# Altium PCB PCB_cmv4000.PcbDoc
Units mm, origin at the board's own origin, x right, y up, seen from the top; angles counter-clockwise.
Board outline 80.74 x 60.93 mm, 4 copper layers (TL, Supply, GND, BL), stack 0.778 mm thick; 43 components, 44 nets, 1083 pads, 82 vias.
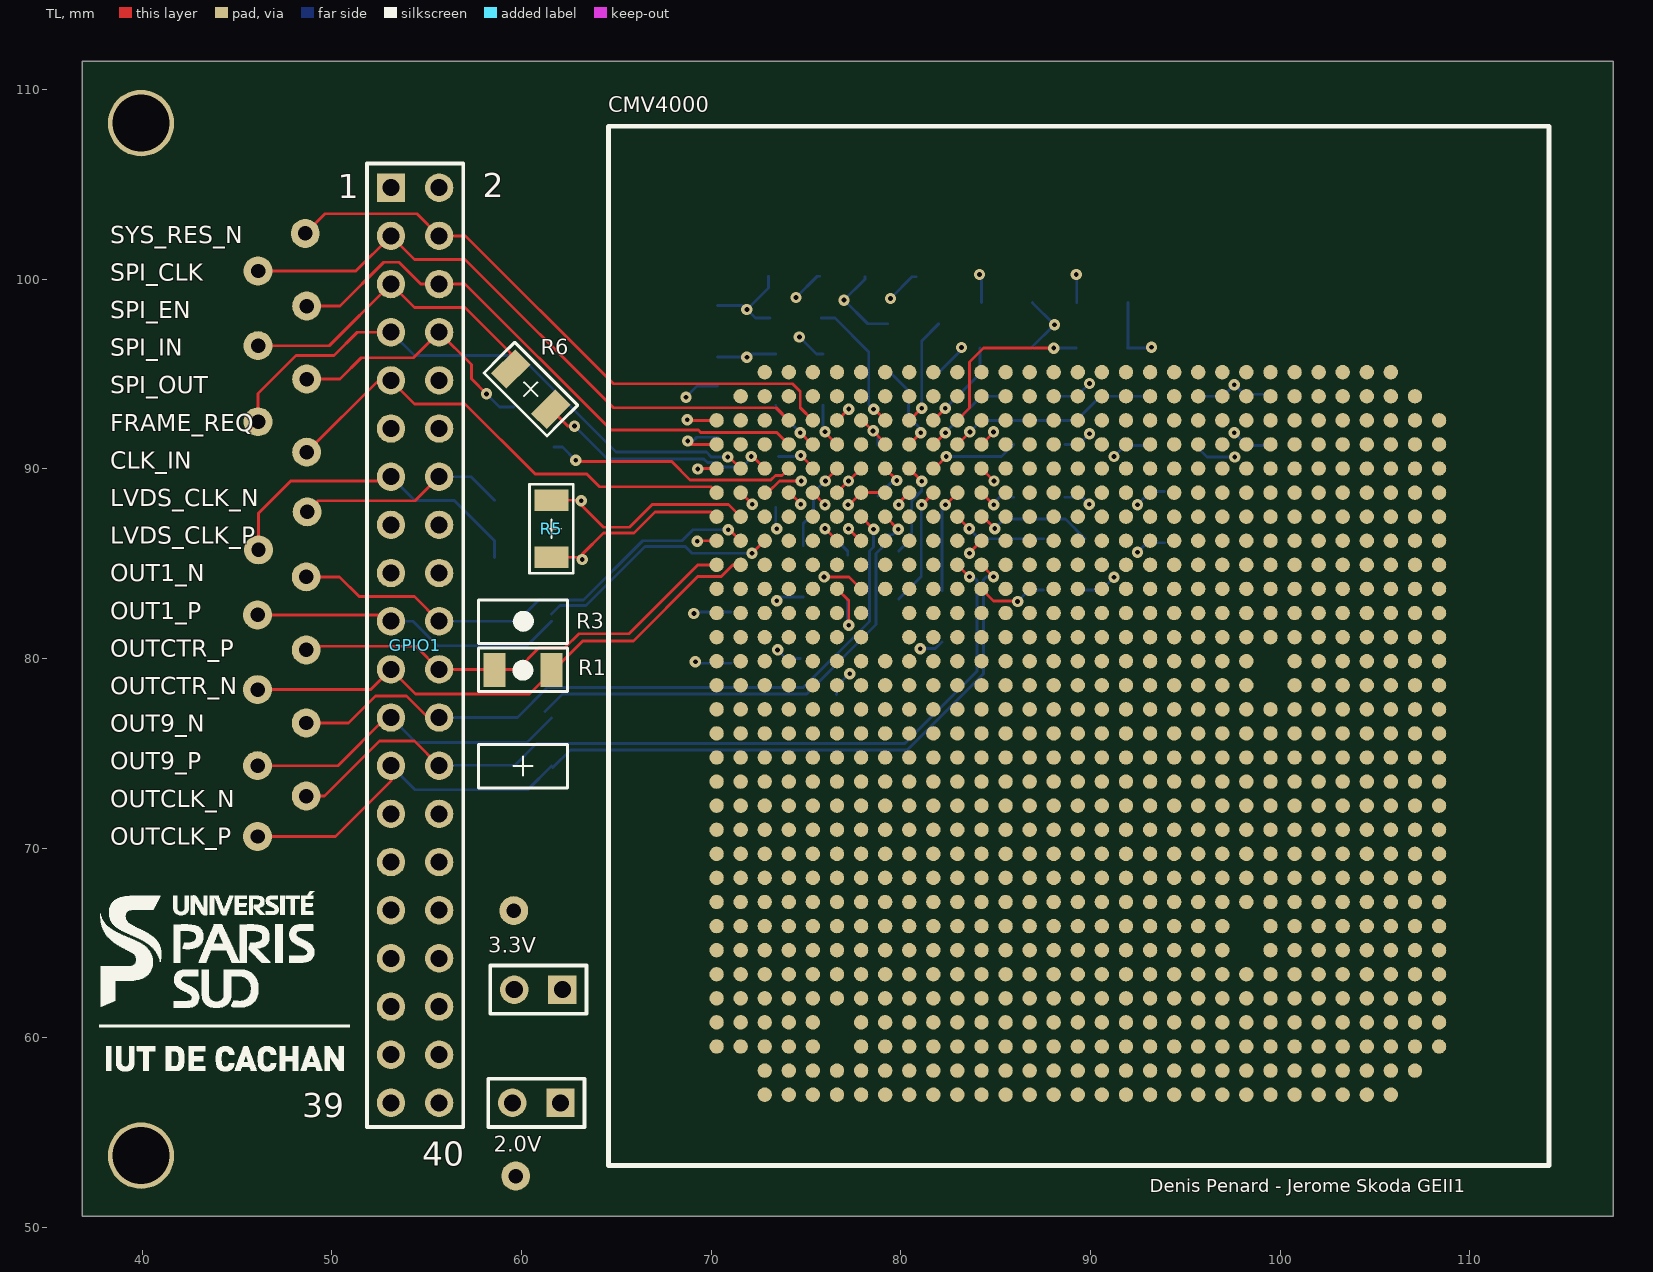
[diagram p0: TL view]
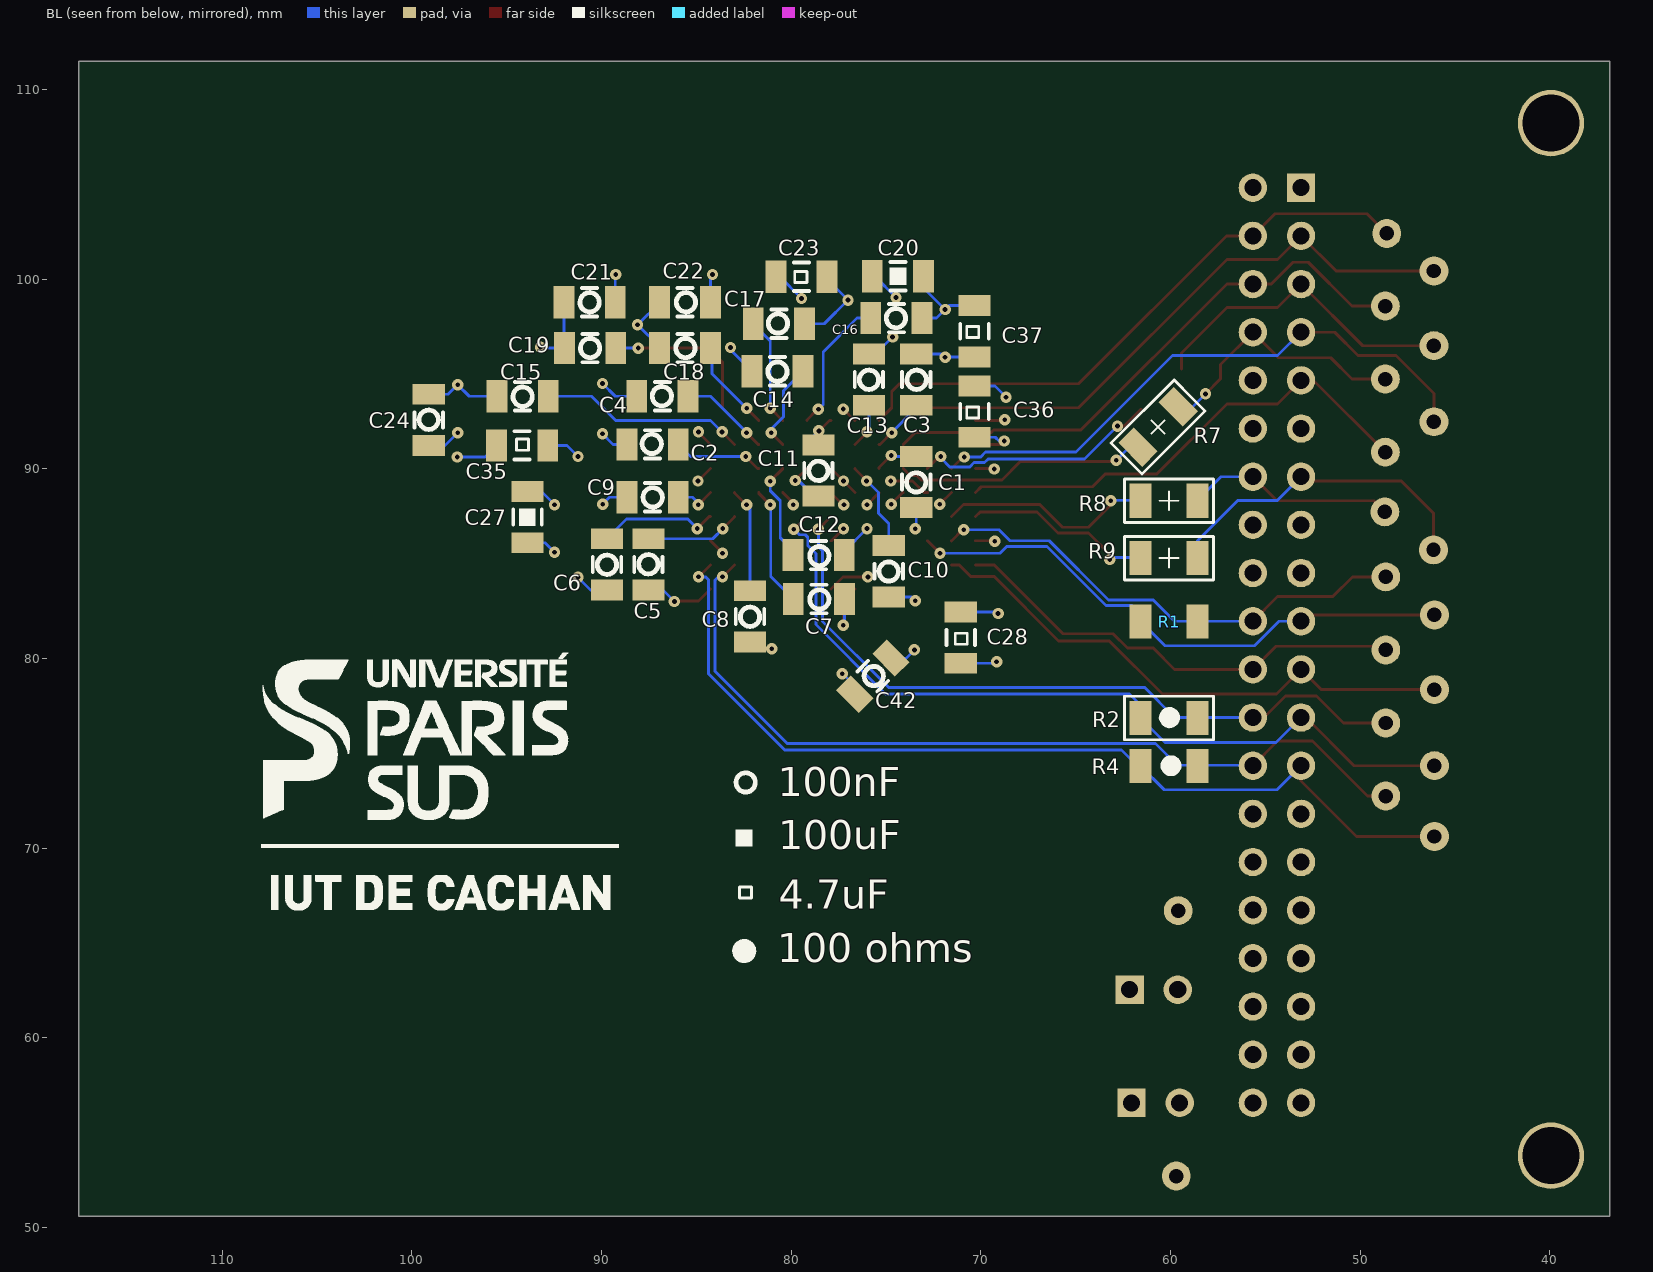
[diagram p1: BL view, seen from below]
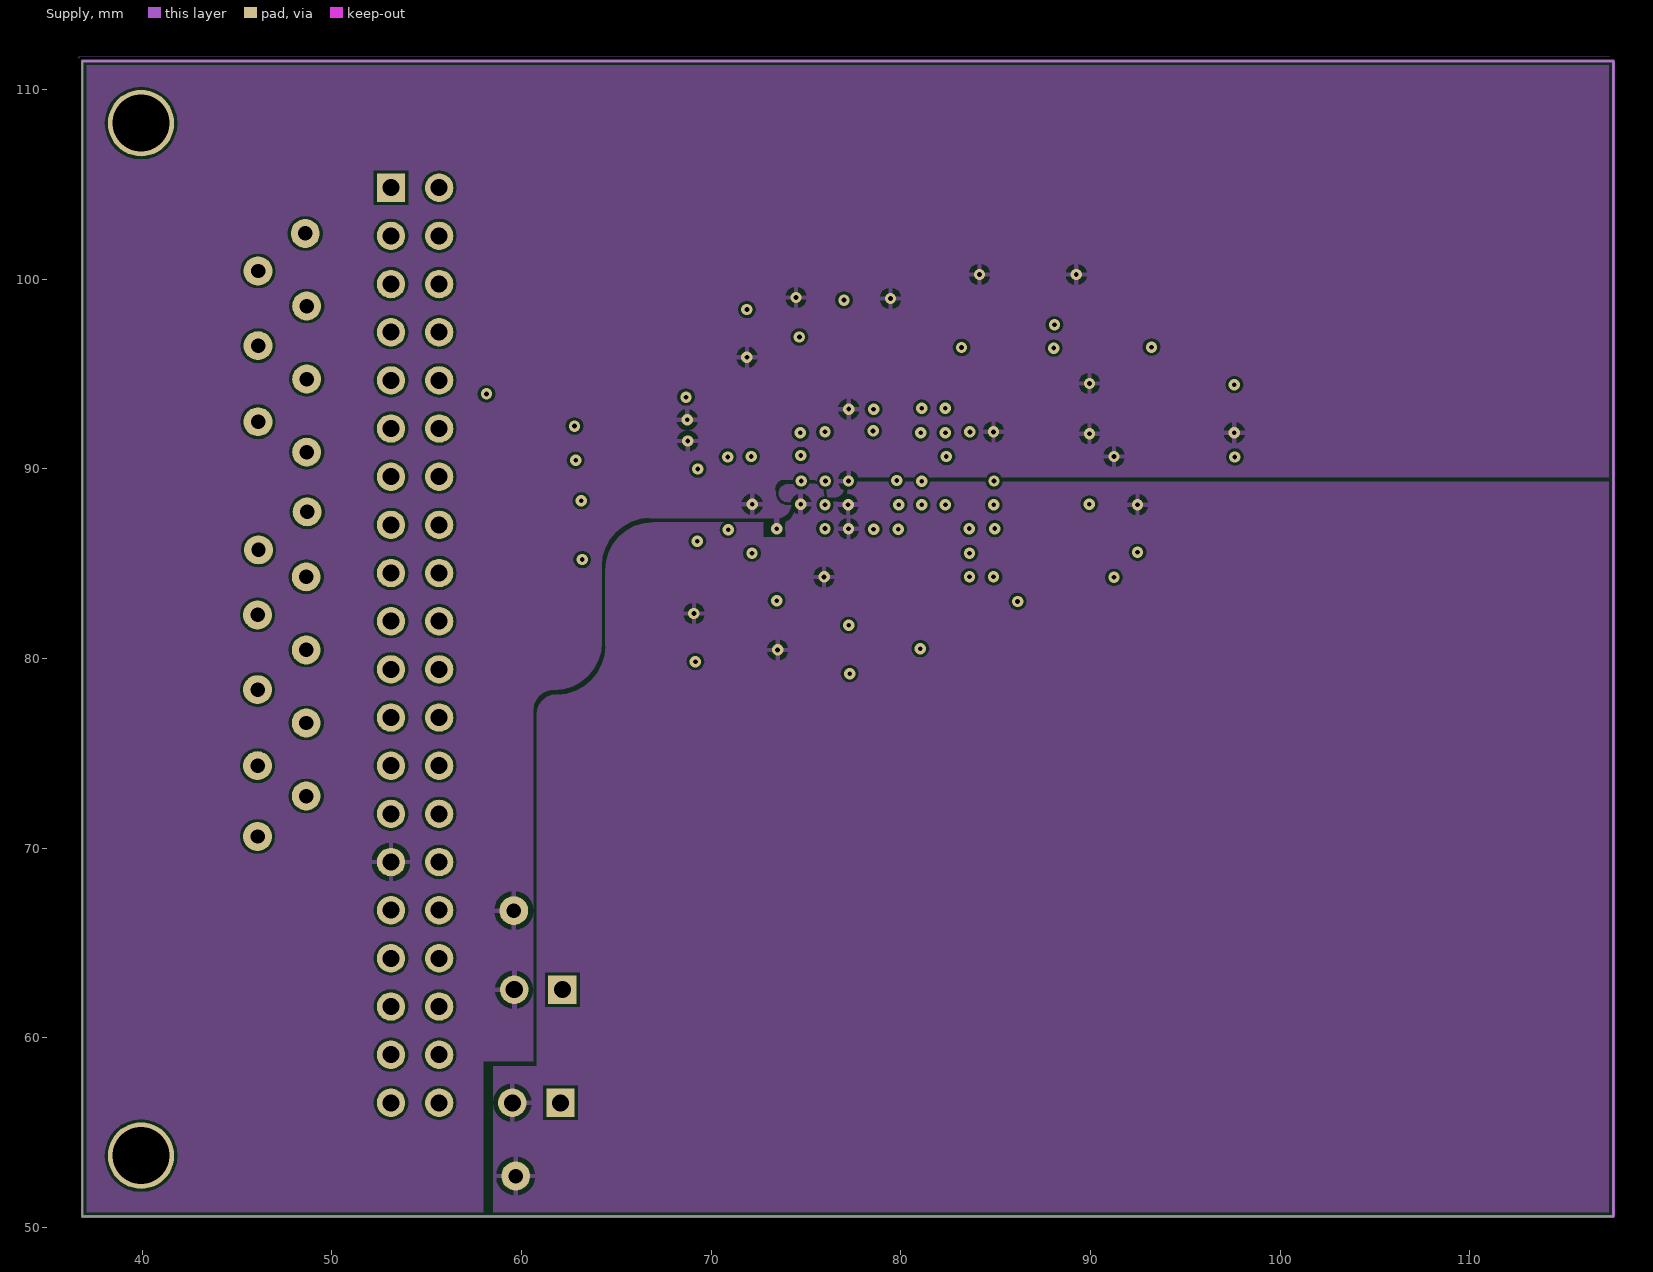
[diagram p2: Supply]
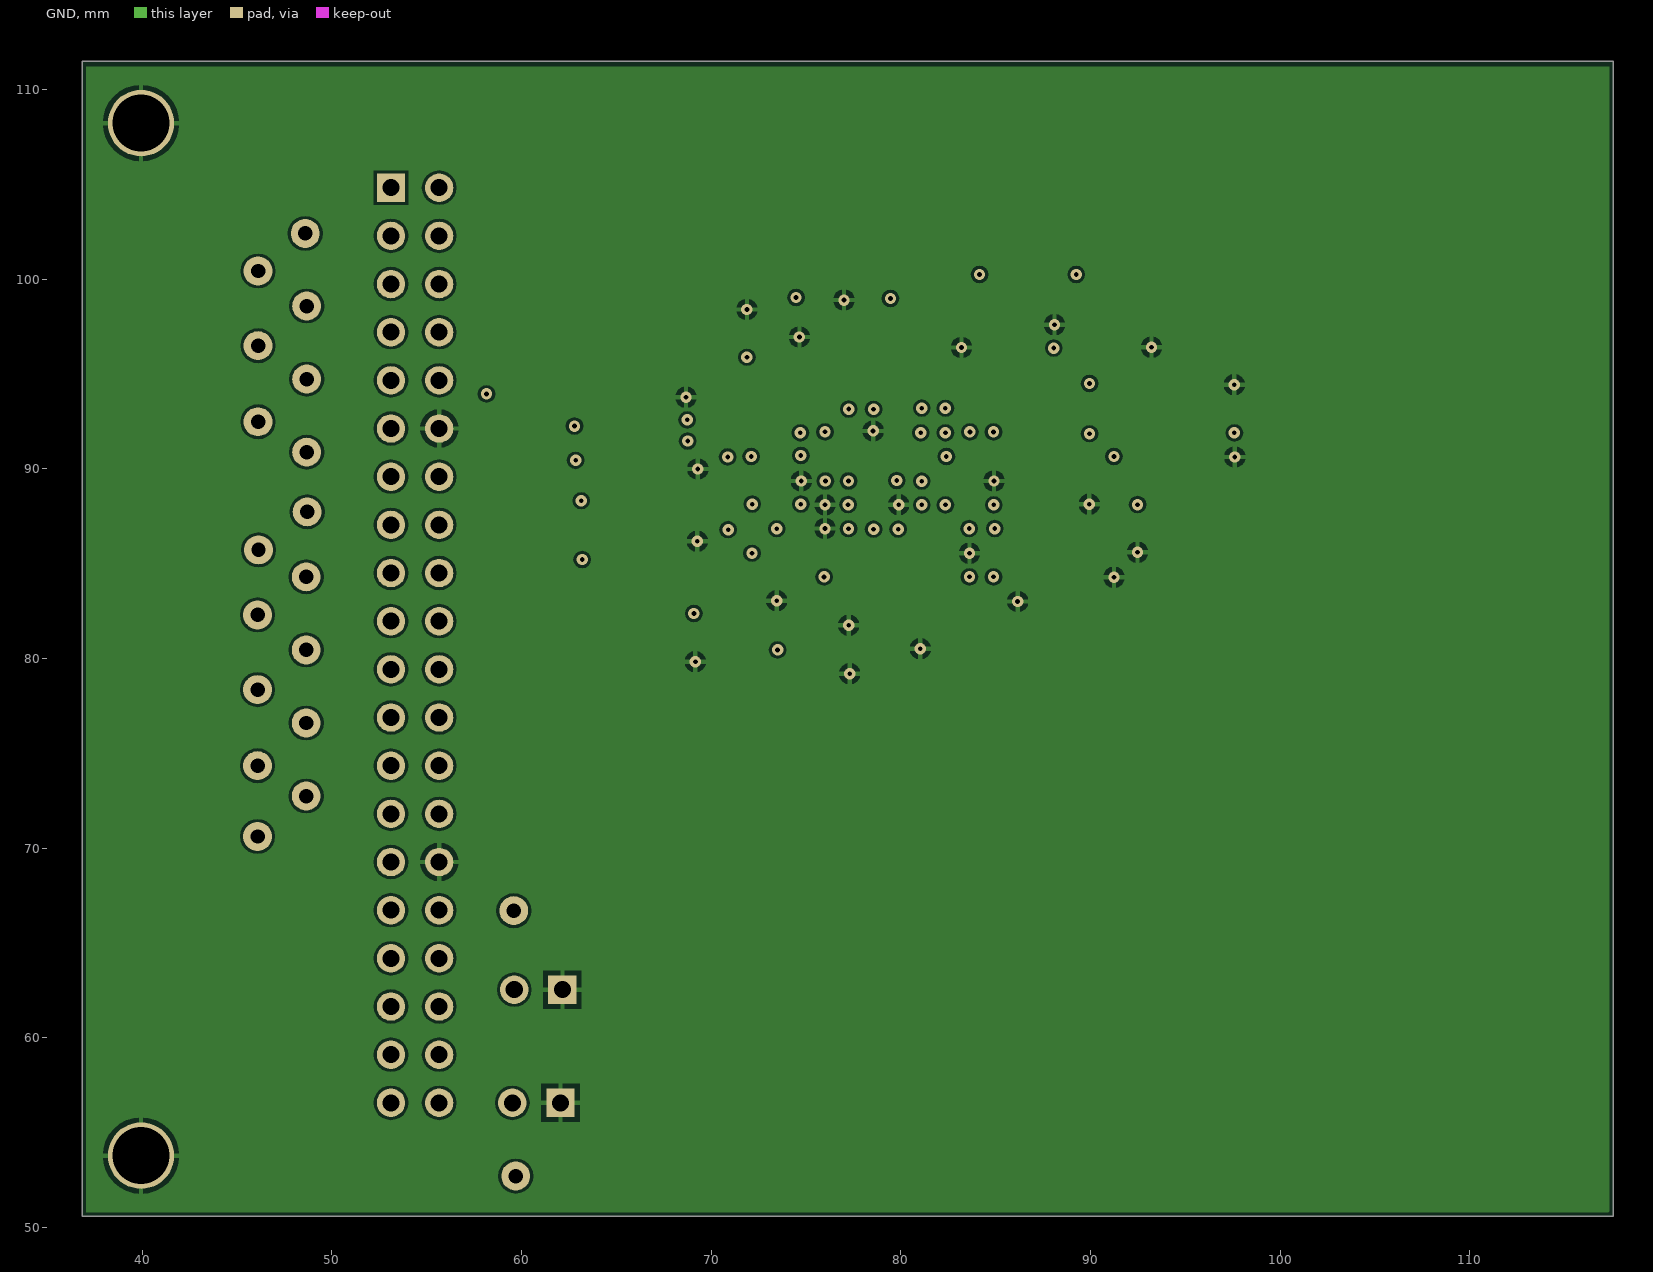
[diagram p3: GND]

## Layer stack, top to bottom
Top Solder: solder mask 0.0102, Solder Resist, Dk 3.5
TL: signal copper 0.0356
Dielectric 1: core 0.254, FR-4, Dk 4.2
Supply: signal copper 0.036
Dielectric 3: prepreg 0.127, Dk 4.2
GND: signal copper 0.036
Dielectric 2: core 0.254, Dk 4.2
BL: signal copper 0.0356
Bottom Solder: solder mask 0.0102, Solder Resist, Dk 3.5

## Board outline
36.83,50.575 36.83,111.506 117.573,111.506 117.573,50.575

## Design rules (kind name [scope] priority, off if disabled: settings)
Clearance [All] p1: gap=0.15
DiffPairsRouting [All] p1: maxlimit=0.254 minlimit=0.15 mostfreqgap=0.15 toplayer_minwidth=0.1 toplayer_maxwidth=0.15 toplayer_prefwidth=0.15 midlayer1_minwidth=0.1 midlayer1_maxwidth=0.15 midlayer1_prefwidth=0.15 midlayer2_minwidth=0.1 midlayer2_maxwidth=0.15 midlayer2_prefwidth=0.15 bottomlayer_minwidth=0.1 bottomlayer_maxwidth=0.15 bottomlayer_prefwidth=0.15 maxuncoupledlength=12.7
MinimumSolderMaskSliver [All] p1: minsoldermaskwidth=0.1
PolygonConnect [All] p1: connectstyle=Relief reliefconductorwidth=0.254 reliefentries=4 polygonreliefangle="90 Angle" airgapwidth=0.254
RoutingVias MicroVias [((StartLayer = 'TL')and(StopLayer = 'Supply')) or ((StartLayer = 'GND')and(StopLayer = 'BL'))] p1 off: holewidth=0.1 width=0.27 viastyle="Through Hole" minholewidth=0.1 minwidth=0.27 maxholewidth=0.1 maxwidth=0.27
RoutingVias BuriedVias [((StartLayer = 'TL')and(StopLayer = 'Supply')) or ((StartLayer = 'GND')and(StopLayer = 'BL')) or ((StartLayer = 'TL')and(StopLayer = 'GND'))     or ((StartLayer = 'Supply')and(StopLayer = 'BL'))] p2 off: holewidth=0.1 width=0.27 viastyle="Through Hole" minholewidth=0.1 minwidth=0.27 maxholewidth=0.1 maxwidth=0.27
RoutingVias ThruVias [((StartLayer = 'TL')and(StopLayer = 'BL'))] p3: holewidth=0.2 width=0.65 viastyle="Through Hole" minholewidth=0.2 minwidth=0.55 maxholewidth=0.25 maxwidth=0.6
SolderMaskExpansion [All] p1: expansion=0.1
UnpouredPolygon [All] p1: allowunpoured=FALSE
Width [All] p1: maxlimit=0.15 minlimit=0.1 preferedwidth=0.15 minimp=50.000000 maximp=50.000000 favimp=50.000000
27 further rules are at their usual default settings.

## Classes and differential pairs
differential pair LVDS_CLK: +LVDS_CLK_P -LVDS_CLK_N
differential pair OUT1: +OUT1_P -OUT1_N
differential pair OUT9: +OUT9_P -OUT9_N
differential pair OUTCLK: +OUTCLK_P -OUTCLK_N
differential pair OUTCTR: +OUTCTR_P -OUTCTR_N

## Components (designator, comment, footprint, x,y, rotation, side; value= is the part's Value field where it differs from the comment)
2.0V "Alim" HDR1X2 62.052,56.566 r180 top (schematic designator JP2)
3.3V "Alim" HDR1X2 62.154,62.535 r180 top (schematic designator JP1)
C1 "Cap Semi" C1206 73.406,89.306 r90 bottom
C2 "Cap Semi" C1206 87.3,91.288 r180 bottom
C3 "Cap Semi" C1206 73.4,94.7 r270 bottom
C4 "Cap Semi" C1206 86.792,93.828 r180 bottom
C5 "Cap Semi" C1206 87.528,84.963 r90 bottom
C6 "Cap Semi" C1206 89.713,84.963 r90 bottom
C7 "Cap Semi" C1206 78.537,83.134 r0 bottom
C8 "Cap Semi" C1206 82.169,82.22 r90 bottom
C9 "Cap Semi" C1206 87.3,88.5 r180 bottom
C10 "Cap Semi" C1206 74.85,84.6 r90 bottom
C11 "Cap Semi" C1206 78.562,89.916 r270 bottom
C12 "Cap Semi" C1206 78.55,85.45 r0 bottom
C13 "Cap Semi" C1206 75.9,94.7 r270 bottom
C14 "Cap Semi" C1206 80.721,95.148 r180 bottom
C15 "Cap Semi" C1206 94.158,93.828 r180 bottom
C16 "Cap Semi" C1206 74.45,97.95 r0 bottom
C17 "Cap Semi" C1206 80.65,97.65 r0 bottom
C18 "Cap Semi" C1206 85.598,96.368 r180 bottom
C19 "Cap Semi" C1206 90.602,96.368 r180 bottom
C20 "Cap Semi" C1206 74.371,100.152 r0 bottom
C21 "Cap Semi" C1206 90.627,98.781 r180 bottom
C22 "Cap Semi" C1206 85.598,98.781 r180 bottom
C23 "Cap Semi" C1206 79.451,100.127 r0 bottom
C24 "Cap Semi" C1206 99.111,92.583 r270 bottom
C27 "Cap Semi" C1206 93.904,87.452 r90 bottom
C28 "Cap Semi" C1206 71.05,81.1 r90 bottom
C35 "Cap Semi" C1206 94.183,91.237 r180 bottom
C36 "Cap Semi" C1206 70.333,93.015 r270 bottom
C37 "Cap Semi" C1206 70.333,97.257 r270 bottom
C42 "Cap Semi" C1206 75.692,79.07 r135 bottom
CMV4000 "CMV4000" PGA940 70.282,58.268 r0 top locked
GPIO1 "Header 20X2" HDR2X20 53.111,104.826 r270 top
R1 "100" 1206-R#1 58.572,81.94 r180 bottom
R2 "100" 1206-R#2 58.572,76.86 r0 bottom
R3 "100" 1206-R#2 61.57,79.4 r180 top
R4 "100" 1206-R#1 61.57,74.32 r0 bottom
R5 "140" 1206-R#2 61.572,88.341 r270 top
R6 "22" 1206-R#2 61.544,93.142 r135 top
R7 "22" 1206-R#2 59.588,93.269 r315 bottom
R8 "165" 1206-R#2 58.572,88.316 r0 bottom
R9 "165" 1206-R#2 61.57,85.29 r180 bottom

## Footprints (in the part's own frame and the unit in brackets; to place one, negate y for a bottom-side part, rotate by r counter-clockwise, add the part's x,y. Pads: shape width x height; smd on the part's side, far side on the other; paste and mask are expansions set on the pad)
1206-R#1 [mm] "Empreinte CMS CDR32  dim = 3.2 x 1.6"
  rect 1.15x1.8 smd: 1(0,0) 2(-3,0)
  body extent -3.12,-0.77 0.08,0.83, height 0.55
1206-R#2 [mm] "Empreinte CMS CDR32  dim = 3.2 x 1.6"
  rect 1.15x1.8 smd: 1(0,0) 2(3,0)
  silkscreen extent -0.85,-1.15 3.85,1.15, body extent -0.08,-0.77 3.12,0.83, height 0.55
C1206 [mm] "Chip Capacitor, Body 3.2x1.6mm, IPC High Density"
  rect 1.1x1.7 smd: 1(-1.35,0) 2(1.35,0)
  silkscreen extent -0.4,-0.75 0.4,0.75, body extent -1.7,-0.9 1.7,0.9, height 1.3
HDR1X2 [mm] "Connector; Header; 2 Position"
  rect 1.5x1.5 hole 0.9: 1(0,0)
  round 1.5 hole 0.9: 2(2.54,0)
  silkscreen extent -1.27,-1.27 3.81,1.27
HDR2X20 [mm] "Connector; Header; 20x2 Position"
  rect 1.5x1.5 hole 0.9: 1(0,0)
  round 1.5 hole 0.9: 2(0,2.54) 3(2.54,0) 4(2.54,2.54) 5(5.08,0) 6(5.08,2.54) 7(7.62,0) 8(7.62,2.54) 9(10.16,0) 10(10.16,2.54) 11(12.7,0) 12(12.7,2.54) 13(15.24,0) 14(15.24,2.54) 15(17.78,0) 16(17.78,2.54) 17(20.32,0) 18(20.32,2.54) 19(22.86,0) 20(22.86,2.54) 21(25.4,0) 22(25.4,2.54) 23(27.94,0) 24(27.94,2.54) 25(30.48,0) 26(30.48,2.54) 27(33.02,0) 28(33.02,2.54) 29(35.56,0) 30(35.56,2.54) 31(38.1,0) 32(38.1,2.54) 33(40.64,0) 34(40.64,2.54) 35(43.18,0) 36(43.18,2.54) 37(45.72,0) 38(45.72,2.54) 39(48.26,0) 40(48.26,2.54)
  silkscreen extent -1.27,-1.27 49.53,3.81
PGA940 [mil]
  round 30 smd: 0(0,50) 0(0,100) 0(0,150) 0(0,200) 0(0,250) 0(0,300) 0(0,350) 0(0,400) 0(0,450) 0(0,500) 0(0,550) 0(0,600) 0(0,650) 0(0,700) 0(0,750) 0(0,800) 0(0,850) 0(0,900) 0(0,950) 0(50,50) 0(50,100) 0(50,150) 0(50,200) 0(50,250) 0(50,300) 0(50,350) 0(50,400) 0(50,450) 0(50,500) 0(50,550) 0(50,600) 0(50,650) 0(50,700) 0(50,750) 0(50,800) 0(50,850) 0(50,900) 0(50,950) 0(50,1400) 0(100,-50) 0(100,0) 0(100,50) 0(100,100) 0(100,150) 0(100,200) 0(100,250) 0(100,300) 0(100,350) 0(100,400) 0(100,450) 0(100,500) 0(100,550) 0(100,600) 0(100,650) 0(100,700) 0(100,750) 0(100,800) 0(100,850) 0(100,900) 0(100,950) 0(100,1400) 0(100,1450) 0(150,-50) 0(150,0) 0(150,50) 0(150,100) 0(150,150) 0(150,200) 0(150,250) 0(150,300) 0(150,350) 0(150,400) 0(150,450) 0(150,500) 0(150,550) 0(150,600) 0(150,650) 0(150,700) 0(150,750) 0(150,800) 0(150,850) 0(150,900) 0(150,950) 0(150,1400) 0(150,1450) 0(200,-50) 0(200,0) 0(200,50) 0(200,100) 0(200,150) 0(200,200) 0(200,250) 0(200,300) 0(200,350) 0(200,400) 0(200,450) 0(200,500) 0(200,550) 0(200,600) 0(200,650) 0(200,700) 0(200,750) 0(200,800) 0(200,850) 0(200,900) 0(200,950) 0(200,1400) 0(200,1450) 0(250,-50) 0(250,0) 0(250,150) 0(250,200) 0(250,250) 0(250,300) 0(250,350) 0(250,400) 0(250,450) 0(250,500) 0(250,550) 0(250,600) 0(250,650) 0(250,700) 0(250,750) 0(250,800) 0(250,850) 0(250,900) 0(250,950) 0(250,1400) 0(250,1450) 0(300,-50) 0(300,0) 0(300,50) 0(300,100) 0(300,150) 0(300,200) 0(300,250) 0(300,300) 0(300,350) 0(300,400) 0(300,450) 0(300,500) 0(300,550) 0(300,600) 0(300,650) 0(300,700) 0(300,750) 0(300,800) 0(300,850) 0(300,900) 0(300,950) 0(300,1400) 0(300,1450) 0(350,-50) 0(350,0) 0(350,50) 0(350,100) 0(350,150) 0(350,200) 0(350,250) 0(350,300) 0(350,350) 0(350,400) 0(350,450) 0(350,500) 0(350,550) 0(350,600) 0(350,650) 0(350,700) 0(350,750) 0(350,800) 0(350,850) 0(350,1400) 0(350,1450) 0(400,-50) 0(400,0) 0(400,50) 0(400,100) 0(400,150) 0(400,200) 0(400,250) 0(400,300) 0(400,350) 0(400,400) 0(400,450) 0(400,500) 0(400,550) 0(400,600) 0(400,650) 0(400,700) 0(400,750) 0(400,800) 0(400,850) 0(400,900) 0(400,950) 0(400,1400) 0(400,1450) 0(450,-50) 0(450,0) 0(450,50) 0(450,100) 0(450,150) 0(450,200) 0(450,250) 0(450,300) 0(450,350) 0(450,400) 0(450,450) 0(450,500) 0(450,550) 0(450,600) 0(450,650) 0(450,700) 0(450,750) 0(450,800) 0(450,850) 0(450,900) 0(450,950) 0(450,1400) 0(450,1450) 0(500,-50) 0(500,0) 0(500,50) 0(500,100) 0(500,150) 0(500,200) 0(500,250) 0(500,300) 0(500,350) 0(500,400) 0(500,450) 0(500,500) 0(500,550) 0(500,600) 0(500,650) 0(500,700) 0(500,750) 0(500,800) 0(500,850) 0(500,900) 0(500,950) 0(500,1400) 0(500,1450) 0(550,-50) 0(550,0) 0(550,50) 0(550,100) 0(550,150) 0(550,200) 0(550,250) 0(550,300) 0(550,350) 0(550,400) 0(550,450) 0(550,500) 0(550,550) 0(550,600) 0(550,650) 0(550,700) 0(550,750) 0(550,800) 0(550,850) 0(550,900) 0(550,950) 0(550,1400) 0(550,1450) 0(600,-50) 0(600,0) 0(600,50) 0(600,100) 0(600,150) 0(600,200) 0(600,250) 0(600,300) 0(600,350) 0(600,400) 0(600,450) 0(600,500) 0(600,550) 0(600,600) 0(600,650) 0(600,700) 0(600,750) 0(600,800) 0(600,850) 0(600,900) 0(600,950) 0(600,1000) 0(600,1050) 0(600,1100) 0(600,1150) 0(600,1200) 0(600,1250) 0(600,1300) 0(600,1350) 0(600,1400) 0(600,1450) 0(650,-50) 0(650,0) 0(650,50) 0(650,100) 0(650,150) 0(650,200) 0(650,250) 0(650,300) 0(650,350) 0(650,400) 0(650,450) 0(650,500) 0(650,550) 0(650,600) 0(650,650) 0(650,700) 0(650,750) 0(650,800) 0(650,850) 0(650,900) 0(650,950) 0(650,1000) 0(650,1050) 0(650,1100) 0(650,1150) 0(650,1200) 0(650,1250) 0(650,1300) 0(650,1350) 0(650,1400) 0(650,1450) 0(700,-50) 0(700,0) 0(700,50) 0(700,100) 0(700,150) 0(700,200) 0(700,250) 0(700,300) 0(700,350) 0(700,400) 0(700,450) 0(700,500) 0(700,550) 0(700,600) 0(700,650) 0(700,700) 0(700,750) 0(700,800) 0(700,850) 0(700,900) 0(700,950) 0(700,1000) 0(700,1050) 0(700,1100) 0(700,1150) 0(700,1200) 0(700,1250) 0(700,1300) 0(700,1350) 0(700,1400) 0(700,1450) 0(750,-50) 0(750,0) 0(750,50) 0(750,100) 0(750,150) 0(750,200) 0(750,250) 0(750,300) 0(750,350) 0(750,400) 0(750,450) 0(750,500) 0(750,550) 0(750,600) 0(750,650) 0(750,700) 0(750,750) 0(750,800) 0(750,850) 0(750,900) 0(750,950) 0(750,1000) 0(750,1050) 0(750,1100) 0(750,1150) 0(750,1200) 0(750,1250) 0(750,1300) 0(750,1350) 0(750,1400) 0(750,1450) 0(800,-50) 0(800,0) 0(800,50) 0(800,100) 0(800,150) 0(800,200) 0(800,250) 0(800,300) 0(800,350) 0(800,400) 0(800,450) 0(800,500) 0(800,550) 0(800,600) 0(800,650) 0(800,700) 0(800,750) 0(800,800) 0(800,850) 0(800,900) 0(800,950) 0(800,1000) 0(800,1050) 0(800,1100) 0(800,1150) 0(800,1200) 0(800,1250) 0(800,1300) 0(800,1350) 0(800,1400) 0(800,1450) 0(850,-50) 0(850,0) 0(850,50) 0(850,100) 0(850,150) 0(850,200) 0(850,250) 0(850,300) 0(850,350) 0(850,400) 0(850,450) 0(850,500) 0(850,550) 0(850,600) 0(850,650) 0(850,700) 0(850,750) 0(850,800) 0(850,850) 0(850,900) 0(850,950) 0(850,1000) 0(850,1050) 0(850,1100) 0(850,1150) 0(850,1200) 0(850,1250) 0(850,1300) 0(850,1350) 0(850,1400) 0(850,1450) 0(900,-50) 0(900,0) 0(900,50) 0(900,100) 0(900,150) 0(900,200) 0(900,250) 0(900,300) 0(900,350) 0(900,400) 0(900,450) 0(900,500) 0(900,550) 0(900,600) 0(900,650) 0(900,700) 0(900,750) 0(900,800) 0(900,850) 0(900,900) 0(900,950) 0(900,1000) 0(900,1050) 0(900,1100) 0(900,1150) 0(900,1200) 0(900,1250) 0(900,1300) 0(900,1350) 0(900,1400) 0(900,1450) 0(950,-50) 0(950,0) 0(950,50) 0(950,100) 0(950,150) 0(950,200) 0(950,250) 0(950,300) 0(950,350) 0(950,400) 0(950,450) 0(950,500) 0(950,550) 0(950,600) 0(950,650) 0(950,700) 0(950,750) 0(950,800) 0(950,850) 0(950,900) 0(950,950) 0(950,1000) 0(950,1050) 0(950,1100) 0(950,1150) 0(950,1200) 0(950,1250) 0(950,1300) 0(950,1350) 0(950,1400) 0(950,1450) 0(1000,-50) 0(1000,0) 0(1000,50) 0(1000,100) 0(1000,150) 0(1000,200) 0(1000,250) 0(1000,300) 0(1000,350) 0(1000,400) 0(1000,450) 0(1000,500) 0(1000,550) 0(1000,600) 0(1000,650) 0(1000,700) 0(1000,750) 0(1000,800) 0(1000,850) 0(1000,900) 0(1000,950) 0(1000,1000) 0(1000,1050) 0(1000,1100) 0(1000,1150) 0(1000,1200) 0(1000,1250) 0(1000,1300) 0(1000,1350) 0(1000,1400) 0(1000,1450) 0(1050,-50) 0(1050,0) 0(1050,50) 0(1050,100) 0(1050,150) 0(1050,200) 0(1050,250) 0(1050,300) 0(1050,350) 0(1050,400) 0(1050,450) 0(1050,500) 0(1050,550) 0(1050,600) 0(1050,650) 0(1050,700) 0(1050,750) 0(1050,800) 0(1050,850) 0(1050,900) 0(1050,950) 0(1050,1000) 0(1050,1050) 0(1050,1100) 0(1050,1150) 0(1050,1200) 0(1050,1250) 0(1050,1300) 0(1050,1350) 0(1050,1400) 0(1050,1450) 0(1100,-50) 0(1100,0) 0(1100,50) 0(1100,100) 0(1100,150) 0(1100,200) 0(1100,350) 0(1100,400) 0(1100,450) 0(1100,500) 0(1100,550) 0(1100,600) 0(1100,650) 0(1100,700) 0(1100,750) 0(1100,800) 0(1100,850) 0(1100,900) 0(1100,950) 0(1100,1000) 0(1100,1050) 0(1100,1100) 0(1100,1150) 0(1100,1200) 0(1100,1250) 0(1100,1300) 0(1100,1350) 0(1100,1400) 0(1100,1450) 0(1150,-50) 0(1150,0) 0(1150,50) 0(1150,100) 0(1150,150) 0(1150,200) 0(1150,250) 0(1150,300) 0(1150,350) 0(1150,400) 0(1150,450) 0(1150,500) 0(1150,550) 0(1150,600) 0(1150,650) 0(1150,700) 0(1150,750) 0(1150,900) 0(1150,950) 0(1150,1000) 0(1150,1050) 0(1150,1100) 0(1150,1150) 0(1150,1200) 0(1150,1250) 0(1150,1300) 0(1150,1350) 0(1150,1400) 0(1150,1450) 0(1200,-50) 0(1200,0) 0(1200,50) 0(1200,100) 0(1200,150) 0(1200,200) 0(1200,250) 0(1200,300) 0(1200,350) 0(1200,400) 0(1200,450) 0(1200,500) 0(1200,550) 0(1200,600) 0(1200,650) 0(1200,700) 0(1200,750) 0(1200,800) 0(1200,850) 0(1200,900) 0(1200,950) 0(1200,1000) 0(1200,1050) 0(1200,1100) 0(1200,1150) 0(1200,1200) 0(1200,1250) 0(1200,1300) 0(1200,1350) 0(1200,1400) 0(1200,1450) 0(1250,-50) 0(1250,0) 0(1250,50) 0(1250,100) 0(1250,150) 0(1250,200) 0(1250,250) 0(1250,300) 0(1250,350) 0(1250,400) 0(1250,450) 0(1250,500) 0(1250,550) 0(1250,600) 0(1250,650) 0(1250,700) 0(1250,750) 0(1250,800) 0(1250,850) 0(1250,900) 0(1250,950) 0(1250,1000) 0(1250,1050) 0(1250,1100) 0(1250,1150) 0(1250,1200) 0(1250,1250) 0(1250,1300) 0(1250,1350) 0(1250,1400) 0(1250,1450) 0(1300,-50) 0(1300,0) 0(1300,50) 0(1300,100) 0(1300,150) 0(1300,200) 0(1300,250) 0(1300,300) 0(1300,350) 0(1300,400) 0(1300,450) 0(1300,500) 0(1300,550) 0(1300,600) 0(1300,650) 0(1300,700) 0(1300,750) 0(1300,800) 0(1300,850) 0(1300,900) 0(1300,950) 0(1300,1000) 0(1300,1050) 0(1300,1100) 0(1300,1150) 0(1300,1200) 0(1300,1250) 0(1300,1300) 0(1300,1350) 0(1300,1400) 0(1300,1450) 0(1350,-50) 0(1350,0) 0(1350,50) 0(1350,100) 0(1350,150) 0(1350,200) 0(1350,250) 0(1350,300) 0(1350,350) 0(1350,400) 0(1350,450) 0(1350,500) 0(1350,550) 0(1350,600) 0(1350,650) 0(1350,700) 0(1350,750) 0(1350,800) 0(1350,850) 0(1350,900) 0(1350,950) 0(1350,1000) 0(1350,1050) 0(1350,1100) 0(1350,1150) 0(1350,1200) 0(1350,1250) 0(1350,1300) 0(1350,1350) 0(1350,1400) 0(1350,1450) 0(1400,-50) 0(1400,0) 0(1400,50) 0(1400,100) 0(1400,150) 0(1400,200) 0(1400,250) 0(1400,300) 0(1400,350) 0(1400,400) 0(1400,450) 0(1400,500) 0(1400,550) 0(1400,600) 0(1400,650) 0(1400,700) 0(1400,750) 0(1400,800) 0(1400,850) 0(1400,900) 0(1400,950) 0(1400,1000) 0(1400,1050) 0(1400,1100) 0(1400,1150) 0(1400,1200) 0(1400,1250) 0(1400,1300) 0(1400,1350) 0(1400,1400) 0(1400,1450) 0(1450,0) 0(1450,50) 0(1450,100) 0(1450,150) 0(1450,200) 0(1450,250) 0(1450,300) 0(1450,350) 0(1450,400) 0(1450,450) 0(1450,500) 0(1450,550) 0(1450,600) 0(1450,650) 0(1450,700) 0(1450,750) 0(1450,800) 0(1450,850) 0(1450,900) 0(1450,950) 0(1450,1000) 0(1450,1050) 0(1450,1100) 0(1450,1150) 0(1450,1200) 0(1450,1250) 0(1450,1300) 0(1450,1350) 0(1450,1400) 0(1500,50) 0(1500,100) 0(1500,150) 0(1500,200) 0(1500,250) 0(1500,300) 0(1500,350) 0(1500,400) 0(1500,450) 0(1500,500) 0(1500,550) 0(1500,600) 0(1500,650) 0(1500,700) 0(1500,750) 0(1500,800) 0(1500,850) 0(1500,900) 0(1500,950) 0(1500,1000) 0(1500,1050) 0(1500,1100) 0(1500,1150) 0(1500,1200) 0(1500,1250) 0(1500,1300) 0(1500,1350) A1(0,1000) A2(50,1000) A3(100,1000) A4(150,1000) A5(200,1000) A6(250,1000) A7(300,1000) A8(350,1000) A9(400,1000) A10(450,1000) A11(500,1000) A12(550,1000) B1(0,1050) B2(50,1050) B3(100,1050) B4(150,1050) B5(200,1050) B6(250,1050) B7(300,1050) B8(350,1050) B9(400,1050) B10(450,1050) B11(500,1050) B12(550,1050) C1(0,1100) C2(50,1100) C3(100,1100) C4(150,1100) C5(200,1100) C6(250,1100) C7(300,1100) C8(350,1100) C9(400,1100) C10(450,1100) C11(500,1100) C12(550,1100) D1(0,1150) D2(50,1150) D3(100,1150) D4(150,1150) D5(200,1150) D6(250,1150) D7(300,1150) D8(350,1150) D9(400,1150) D10(450,1150) D11(500,1150) D12(550,1150) E1(0,1200) E2(50,1200) E3(100,1200) E4(150,1200) E5(200,1200) E6(250,1200) E7(300,1200) E8(350,1200) E9(400,1200) E10(450,1200) E11(500,1200) E12(550,1200) F1(0,1250) F2(50,1250) F3(100,1250) F4(150,1250) F5(200,1250) F6(250,1250) F7(300,1250) F8(350,1250) F9(400,1250) F10(450,1250) F11(500,1250) F12(550,1250) G1(0,1300) G2(50,1300) G3(100,1300) G4(150,1300) G5(200,1300) G6(250,1300) G7(300,1300) G8(350,1300) G9(400,1300) G10(450,1300) G11(500,1300) G12(550,1300) H1(0,1350) H2(50,1350) H3(100,1350) H4(150,1350) H5(200,1350) H6(250,1350) H7(300,1350) H8(350,1350) H9(400,1350) H10(450,1350) H11(500,1350) H12(550,1350)
  silkscreen extent -224,-197 1728,1961

## Part data
2.0V 3.3V: library part "Connecteur Alimentation", "Connecteur d'alimentation"
C1 C2 C3 C4 C5 C6 C7 C8 C9 C10 C11 C12 C13 C14 C15 C16 C17 C18 C19 C20 C21 C22 C23 C24 C27 C28 C35 C36 C37 C42: "Capacitor (Semiconductor SIM Model)"
GPIO1: "Header, 20-Pin, Dual row"
R1 R2 R3 R4 R5 R6 R7 R8 R9: library part Res, "Resistance"

## Free pads (board coordinates)
  round 1.524 hole 0.762: 2(48.641,72.746) 2(48.666,90.881) 3(48.641,76.598) 3(48.666,94.734) 4(48.641,80.45) 4(48.666,98.586) 5(46.076,78.359) 5(46.101,96.495) 6(59.588,66.7) 7(59.69,52.705) 8(46.076,70.612) 8(46.076,74.346) 8(46.101,92.481) 9(48.59,102.413) 9(48.641,84.303) 9(48.692,87.732) 10(46.076,82.296) 10(46.101,100.432) 10(46.126,85.725)
  round 3.5 hole 3: 11(39.931,108.232) 12(39.931,53.784)

## Via types
v1: diameter 0.6, hole 0.25, TL to BL, 82 vias

## Nets (pads, with @x,y where several pads share a name; then routed paths per layer and width w, separated by ;. In a path a pad name is that pad's centre, name@x,y a point inside that pad or via, vN(x,y) a via of type N, cw(c..) or ccw(c..) an arc to the next point about the centre after c; other vN are vias at no path point)
ADC: C4.2 CMV4000.G10 | length 4.8
  TL w0.15: CMV4000.G10 81.738,91.288 v1(82.35,91.9)
  BL w0.15: v1@82.35,91.926 84.252,93.828 C4.2
CLK_IN: CMV4000.E1 GPIO1.9 pad.2@48.666,90.881 | length 25.6
  TL w0.15: pad.2@48.666,90.881 52.451,94.666 GPIO1.9 54.356,93.421 57.023,93.421 60.719,89.725 63.436,89.725 64.11,89.052 69.977,89.052 CMV4000.E1
CMD_N: C13.2 CMV4000.G6 | length 2.2
  TL w0.15: v1(76,91.95) 76,91.919 CMV4000.G6
  BL w0.15: v1@75.9,92.05 C13.2
CMD_P: C3.2 CMV4000.G5 | length 2.9
  TL w0.15: v1(74.7,91.9) 75.312,91.288 CMV4000.G5
  BL w0.15: C3.2 73.4,93.2 v1(74.7,91.9)
CMD_P_INV: C1.2 CMV4000.F5 | length 2.1
  TL w0.15: v1(74.727,90.703) 75.362,90.068 CMV4000.F5
  BL w0.15: C1.2@73.55,90.65 74.673,90.65 v1(74.727,90.703)
COL_AMP: C14.2 CMV4000.G9 | length 4.8
  TL w0.15: CMV4000.G9 v1@81.05,91.896
  BL w0.15: C14.2 80.4,94.12 80.4,92.75 81.05,92.1 v1(81.05,91.9)
COL_LOAD: C12.2 CMV4000.F9 | length 5.1
  TL w0.15: CMV4000.F9 80.442,90.008 v1(81.1,89.35)
  BL w0.15: C12.2@79.887,85.674 80.575,86.362 80.575,88.317 81.1,88.842 v1(81.1,89.35)
COL_PC: C18.2 CMV4000.H10 | length 4.8
  TL w0.15: CMV4000.H10 v1(82.347,93.193)
  BL w0.15: v1(82.347,93.193) 84.172,95.018 C18.2@84.172,96.368
FRAME_REQ: CMV4000.F2 GPIO1.7 pad.8@46.101,92.481 | length 31.3
  TL w0.15: pad.8@46.101,92.481 46.101,93.98 48.095,95.974 50.102,95.974 51.333,97.206 GPIO1.7 ; v1(70.866,90.627) 70.942,90.627 CMV4000.F2
  BL w0.15: GPIO1.7 54.343,95.974 59.88,95.974 64.973,90.881 69.748,90.881 70.002,90.627 v1(70.866,90.627)
GND: 2.0V.1 3.3V.1 C5.1 C6.1 C7.1 C8.1 C9.1 C10.1 C11.1 C12.1 C13.1 C14.1 C15.1 C16.1 C17.1 C18.1 C19.1 C20.1 C21.1 C22.1 C23.1 C24.1 C27.1 C28.1 C35.1 C36.1 C37.1 C42.1 CMV4000.A6 CMV4000.A12 CMV4000.C1 CMV4000.C6 CMV4000.C12 CMV4000.E3 CMV4000.E5 CMV4000.E9 CMV4000.F1 CMV4000.F12 CMV4000.G8 CMV4000.H7 GPIO1.12 GPIO1.30 pad.11 pad.12 | length 60.2
  TL w0.15: v1(69.266,86.182) 69.291,86.208 CMV4000.C1 ; v1(69.291,89.992) 69.317,90.018 CMV4000.F1 ; CMV4000.E3@72.798,88.748 CMV4000.E3 72.982,88.748 73.591,89.357 v1(74.752,89.357) ; CMV4000.E5 75.362,88.738 v1(76,88.1) ; v1(76,86.85) 76.632,86.218 CMV4000.C6 ; CMV4000.A6 77.25,83.049 v1(77.25,81.75) ; CMV4000.H7 77.978,92.558 v1(78.537,91.999) 79.172,91.364 CMV4000.G8 ; v1(79.883,88.113) 79.883,88.189 CMV4000.E9 ; v1(83.617,85.547) 83.617,85.573 CMV4000.C12 ; CMV4000.A12 84.887,83.033 86.131,83.033 v1(86.157,83.007) ; CMV4000.F12 v1(84.912,89.357)
  BL w0.15: v1(68.669,93.781) 69.254,94.365 C36.1 ; v1(69.164,79.832) 69.246,79.75 C28.1 ; C37.1 71.675,98.607 v1(71.882,98.4) ; C20.1 73.021,99.539 v1(71.882,98.4) ; C16.1 72.332,97.95 v1(71.882,98.4) ; v1(73.45,83.05) 73.65,83.25 C10.1 ; v1(74.651,96.952) 75.552,96.05 C13.1 ; v1(76,86.85) 77.2,85.65 C12.1 ; C42.1@76.605,78.095 76.605,78.505 v1(77.3,79.2) ; C7.1 77.187,81.813 v1(77.25,81.75) ; C23.1 78.101,100.001 v1(77,98.9) 78.25,97.65 C17.1 ; v1(78.537,91.999) 78.791,91.745 C11.1@78.791,91.266 ; v1(81.026,80.518) 81.817,80.518 C8.1 ; C14.1 83.2,96.277 v1(83.2,96.4) ; v1(86.157,83.007) 86.763,83.613 C5.1 ; C18.1 86.948,96.448 v1(88.1,97.6) 86.948,98.752 C22.1 ; C9.1 89.579,88.5 v1(89.941,88.138) ; C6.1 90.573,83.613 v1(91.237,84.277) ; C21.1 91.977,96.393 C19.1 93.167,96.368 v1(93.218,96.418) ; v1(92.481,85.598) 92.986,86.102 C27.1 ; C15.1 96.977,93.828 v1(97.587,94.437) 98.091,93.933 C24.1 ; C35.1 96.143,90.627 v1(97.612,90.627)
LVDS: C19.2 CMV4000.H11 | length 9.3
  TL w0.15: CMV4000.H11 83.628,93.203 83.628,95.642 84.353,96.368 v1(88.062,96.368)
  BL w0.15: v1(88.062,96.368) C19.2
LVDS_CLK_N: CMV4000.D2 R5.1 R8.2 | length 13
  TL w0.15: R5.1 v1@63.119,88.341 ; v1(63.144,88.316) 63.144,88.085 64.313,86.916 65.682,86.916 66.888,88.123 70.907,88.123 CMV4000.D2
  BL w0.15: R8.2@61.572,88.341 63.119,88.341 v1(63.144,88.316)
LVDS_CLK_P: CMV4000.D1 R5.2 R9.1 | length 11.6
  TL w0.15: R5.2 v1@63.071,85.341 ; v1(63.195,85.217) 63.195,85.499 64.313,86.616 65.927,86.616 67.043,87.732 70.028,87.732 CMV4000.D1
  BL w0.15: R9.1@61.57,85.316 63.096,85.316 v1(63.195,85.217)
NetGPIO1_5: GPIO1.5 pad.5@46.101,96.495 R6.2 | length 17
  TL w0.15: pad.5@46.101,96.495 49.86,96.495 GPIO1.5 54.356,98.501 57.023,98.501 59.423,96.101 R6.2
NetGPIO1_8: GPIO1.8 pad.3@48.666,94.734 R7.1 | length 14
  TL w0.15: pad.3@48.666,94.734 50.419,94.734 51.545,95.86 54.305,95.86 GPIO1.8 57.353,95.504 57.353,94.747 v1(58.15,93.95)
  BL w0.15: v1(58.15,93.95) 58.831,93.269 R7.1
NetGPIO1_13: GPIO1.13 pad.10@46.126,85.725 R9.2 | length 17.5
  TL w0.15: pad.10@46.126,85.725 46.126,87.655 47.828,89.357 52.883,89.357 GPIO1.13
  BL w0.15: GPIO1.13 54.369,88.328 56.451,88.328 58.57,86.21 R9.2@58.57,85.316
NetGPIO1_14: GPIO1.14 pad.9@48.692,87.732 R8.1 | length 11.2
  TL w0.15: pad.9@48.692,87.732 49.276,88.316 54.381,88.316 GPIO1.14
  BL w0.15: GPIO1.14 57.328,89.586 R8.1@58.572,88.341
OUT1_N: CMV4000.C2 GPIO1.20 pad.9@48.641,84.303 R1.1 | length 26.1
  TL w0.15: pad.9@48.641,84.303 50.394,84.303 51.435,83.261 54.356,83.261 GPIO1.20 ; v1(70.891,86.792) 70.962,86.792 71.552,86.202 CMV4000.C2
  BL w0.15: GPIO1.20 59.779,81.966 60.904,83.091 63.271,83.091 66.388,86.208 68.453,86.208 69.037,86.792 v1(70.891,86.792)
OUT1_P: CMV4000.C3 GPIO1.19 pad.10@46.076,82.296 R1.2 | length 29.9
  TL w0.15: pad.10@46.076,82.296 52.781,82.296 GPIO1.19 ; v1(72.15,85.55) 72.808,86.208 CMV4000.C3
  BL w0.15: GPIO1.19 54.273,81.966 55.568,80.67 60.277,80.67 R1.2@61.572,81.966 ; R1.2@61.572,82.336 62.027,82.791 63.396,82.791 66.512,85.908 68.626,85.908 68.984,85.55 v1(72.15,85.55)
OUT9_N: CMV4000.D7 GPIO1.24 pad.3@48.641,76.598 R2.1 | length 38.8
  TL w0.15: pad.3@48.641,76.598 50.868,76.598 52.299,78.029 53.924,78.029 55.067,76.886 GPIO1.24 ; CMV4000.D7 v1(78.562,86.817)
  BL w0.15: GPIO1.24 59.779,76.886 61.354,78.461 74.856,78.461 78.35,81.954 78.35,85.672 78.562,85.884 v1(78.562,86.817)
OUT9_P: CMV4000.D8 GPIO1.23 pad.8@46.076,74.346 R2.2 | length 43.6
  TL w0.15: pad.8@46.076,74.346 50.317,74.346 52.857,76.886 GPIO1.23 ; CMV4000.D8 79.197,87.478 v1(79.858,86.817)
  BL w0.15: GPIO1.23 54.432,75.565 60.277,75.565 R2.2 ; R2.2@61.226,77.207 62.153,78.135 75.033,78.135 78.687,81.789 78.687,85.527 79.125,85.965 79.125,86.393 79.257,86.525 79.565,86.525 v1(79.858,86.817)
OUTCLK_N: CMV4000.B11 GPIO1.26 pad.2@48.641,72.746 R4.2 | length 45.4
  TL w0.15: pad.2@48.641,72.746 49.606,72.746 52.502,75.641 54.356,75.641 GPIO1.26 ; CMV4000.B11 v1(83.617,84.303)
  BL w0.15: GPIO1.26 55.677,74.371 59.645,74.371 60.783,75.509 80.208,75.509 84.023,79.324 84.023,84.125 83.845,84.303 v1(83.617,84.303)
OUTCLK_P: CMV4000.B12 GPIO1.25 pad.8@46.076,70.612 R4.1 | length 49.8
  TL w0.15: pad.8@46.076,70.612 50.19,70.612 53.111,73.533 GPIO1.25 ; CMV4000.B12 v1(84.887,84.303)
  BL w0.15: GPIO1.25 54.381,73.076 60.325,73.076 R4.1 ; R4.1@61.644,74.246 62.579,75.18 80.333,75.18 84.351,79.198 84.351,84.153 84.501,84.303 v1(84.887,84.303)
OUTCTR_N: CMV4000.B1 GPIO1.22 pad.4@48.641,80.45 R3.2 | length 24.5
  TL w0.15: pad.4@48.641,80.45 48.836,80.645 54.432,80.645 GPIO1.22 59.776,79.426 60.901,80.551 62.27,80.551 63.025,81.305 65.659,81.305 69.291,84.938 CMV4000.B1
OUTCTR_P: CMV4000.B2 GPIO1.21 pad.5@46.076,78.359 R3.1 | length 29.3
  TL w0.15: pad.5@46.076,78.359 52.045,78.359 GPIO1.21 54.407,78.13 60.424,78.13 63.221,80.927 65.898,80.927 69.303,84.332 70.533,84.332 71.139,84.938 CMV4000.B2
RAMP: C2.2 CMV4000.F10 | length 4.8
  TL w0.15: CMV4000.F10 81.768,90.018 v1(82.4,90.65)
  BL w0.15: v1(82.4,90.65) 85.312,90.65 C2.2
REF_ADC: C6.2 CMV4000.D12 | length 6.4
  TL w0.15: CMV4000.D12 84.322,87.478 v1(84.95,86.85)
  BL w0.15: v1(84.95,86.85) 85.45,87.35 88.676,87.35 C6.2
SG_ADC: C7.2 CMV4000.E10 | length 6.4
  TL w0.15: v1(81.1,88.1) 81.712,88.712 CMV4000.E10
  BL w0.15: C7.2 81.077,84.324 81.077,88.077 v1(81.1,88.1)
SPI_CLK: CMV4000.H4 GPIO1.3 pad.10@46.101,100.432 | length 32.8
  TL w0.15: pad.10@46.101,100.432 51.257,100.432 GPIO1.3 54.356,101.041 57.023,101.041 64.846,93.218 73.431,93.218 CMV4000.H4
SPI_EN: CMV4000.G4 GPIO1.6 pad.4@48.666,98.586 | length 30.4
  TL w0.15: pad.4@48.666,98.586 50.419,98.586 52.73,100.897 53.526,100.897 54.678,99.746 GPIO1.6 57.023,99.746 64.728,92.041 69.325,92.041 69.444,91.923 73.457,91.923 CMV4000.G4
SPI_IN: CMV4000.F3 R6.1 | length 13.1
  TL w0.15: R6.1 62.433,92.253 v1(62.789,92.253) ; v1(72.106,90.653) 72.187,90.653 CMV4000.F3
  BL w0.15: v1(62.789,92.253) 64.524,90.517 69.604,90.517 69.794,90.327 70.353,90.327 70.578,90.102 71.636,90.102 72.106,90.572 v1(72.106,90.653)
SPI_OUT: CMV4000.F4 R7.2 | length 13.4
  TL w0.15: v1(62.85,90.45) 62.922,90.378 67.915,90.378 68.881,89.412 73.138,89.412 73.383,89.657 73.731,89.657 CMV4000.F4
  BL w0.15: R7.2 62.153,91.147 v1(62.85,90.45)
SYS_RES_N: CMV4000.H5 GPIO1.4 pad.9@48.59,102.413 | length 32.2
  TL w0.15: pad.9@48.59,102.413 49.632,103.454 54.483,103.454 GPIO1.4 57.048,102.286 64.846,94.488 74.288,94.488 74.698,94.079 74.698,93.222 CMV4000.H5
VBGAP: C15.2 CMV4000.G11 | length 10.9
  TL w0.15: CMV4000.G11 v1(83.642,91.948)
  BL w0.15: v1(83.642,91.948) 84.252,92.558 89.252,92.558 90.522,93.828 C15.2
VCC5: GPIO1.11
VDD20: 2.0V.2 C27.2 C28.2 C42.2 CMV4000.A7 CMV4000.C7 CMV4000.E4 CMV4000.E7 CMV4000.E8 pad.7 | length 11.3
  TL w0.15: CMV4000.E4 74.117,88.748 v1(74.727,88.138) ; v1(75.95,84.3) 77.269,84.3 CMV4000.A7 ; v1(77.216,88.113) 77.292,88.113 77.902,88.722 CMV4000.E7 CMV4000.E8 ; v1(77.241,86.843) 77.876,86.208 CMV4000.C7
  BL w0.15: v1(69.088,82.372) 69.166,82.45 C28.2 ; v1(73.5,80.45) 73.945,80.005 C42.2@74.695,80.005 ; v1(92.481,88.113) 93.171,88.802 C27.2
VDD33: 3.3V.2 C1.1 C2.1 C3.1 C4.1 C20.2 C21.2 C22.2 C23.2 C24.2 C35.2 C36.2 C37.2 CMV4000.E2 CMV4000.E6 CMV4000.F7 CMV4000.G1 CMV4000.G12 CMV4000.H1 CMV4000.H6 GPIO1.29 pad.6 | length 27.4
  TL w0.15: v1(68.732,92.583) 68.758,92.558 CMV4000.H1 ; v1(68.758,91.465) 68.758,91.389 68.859,91.288 CMV4000.G1 ; CMV4000.E2 v1(72.161,88.138) ; CMV4000.E6 v1(77.241,89.357) CMV4000.F7 ; CMV4000.H6 76.658,92.558 v1(77.25,93.15) ; CMV4000.G12 84.887,91.923 v1(84.887,91.948)
  BL w0.15: v1(68.758,91.465) 69.037,91.465 69.237,91.665 C36.2 ; C37.2 71.86,95.907 v1(71.882,95.885) 72.047,96.05 C3.1 ; C1.1 73.406,86.893 v1(73.457,86.843) ; v1(74.473,99.035) 75.59,100.152 C20.2 ; v1(79.451,98.984) 80.594,100.127 C23.2 ; v1(84.15,100.25) 84.248,100.152 C22.2 ; C4.1 89.278,93.828 v1(89.95,94.5) ; C2.1 89.388,91.288 v1(89.95,91.85) ; v1(89.25,100.25) 89.277,100.223 C21.2 ; v1(91.237,90.653) 91.821,91.237 C35.2 ; v1(97.587,91.897) 98.251,91.233 C24.2
VPCH_H: C10.2 CMV4000.F6 | length 4.8
  TL w0.15: v1(76.022,89.357) 76.022,89.383 76.632,89.992 CMV4000.F6
  BL w0.15: C10.2 74.85,87.118 75.387,87.655 75.387,88.748 75.997,89.357 v1(76.022,89.357)
VRAMP1: C8.2 CMV4000.E11 | length 5.5
  TL w0.15: v1(82.35,88.1) 82.982,88.732 CMV4000.E11
  BL w0.15: C8.2 82.169,87.919 v1(82.35,88.1)
VRAMP2: C9.2 CMV4000.E12 | length 2.2
  TL w0.15: CMV4000.E12 v1(84.9,88.1)
  BL w0.15: v1(84.9,88.1) 84.894,88.1 84.844,88.15 85.194,88.5 C9.2
VREF: C5.2 CMV4000.D11 | length 5
  TL w0.15: CMV4000.D11 82.982,87.468 v1(83.6,86.85)
  BL w0.15: v1(83.6,86.85) 84.137,86.313 C5.2
VRES_L: C16.2 CMV4000.H8 | length 7
  TL w0.15: v1@78.71,93.04 79.172,92.578 CMV4000.H8
  BL w0.15: C16.2 76.523,97.95 78.308,96.164 78.308,93.396 v1(78.562,93.142)
VTF_L2: C11.2 CMV4000.F8 | length 2.2
  TL w0.15: CMV4000.F8 79.79,89.4 79.781,89.392 v1(79.781,89.383)
  BL w0.15: C11.2@78.791,88.566 79.625,89.4 79.642,89.383 v1(79.781,89.383)
VTF_L3: C17.2 CMV4000.H9 | length 5.7
  TL w0.15: CMV4000.H9 80.458,92.558 v1(81.1,93.2)
  BL w0.15: v1(81.1,93.2) 81.1,96.75 C17.2
pads on no net: CMV4000.0 CMV4000.A1 CMV4000.A2 CMV4000.A3 CMV4000.A4 CMV4000.A5 CMV4000.A8 CMV4000.A9 CMV4000.A10 CMV4000.A11 CMV4000.B3 CMV4000.B4 CMV4000.B5 CMV4000.B6 CMV4000.B7 CMV4000.B8 CMV4000.B9 CMV4000.B10 CMV4000.C4 CMV4000.C5 CMV4000.C8 CMV4000.C9 CMV4000.C10 CMV4000.C11 CMV4000.D3 CMV4000.D4 CMV4000.D5 CMV4000.D6 CMV4000.D9 CMV4000.D10 CMV4000.F11 CMV4000.G2 CMV4000.G3 CMV4000.G7 CMV4000.H2 CMV4000.H3 CMV4000.H12 GPIO1.1 GPIO1.2 GPIO1.10 GPIO1.15 GPIO1.16 GPIO1.17 GPIO1.18 GPIO1.27 GPIO1.28 GPIO1.31 GPIO1.32 GPIO1.33 GPIO1.34 GPIO1.35 GPIO1.36 GPIO1.37 GPIO1.38 GPIO1.39 GPIO1.40
copper on no net: | length 283.4
  Supply w0.15: 117.543,111.506 cw(c117.543,111.477) 117.573,111.477 ; 36.83,50.575 36.83,111.506 117.573,111.506 117.573,89.332 117.573,50.575 60.808,50.575 41.808,50.575 36.83,50.575

## Polygon pours and split planes (outlines as drawn)
GND on GND "Le GND" (solid, pour order 42): 41.707,111.201 117.348,111.201 117.348,50.851 117.297,50.8 37.033,50.8 37.033,111.204 38.262,111.215 38.405,111.201
VDD20 on Supply "Le GND" (solid, pour order 56): 60.808,50.575 58.496,50.575 58.496,58.496 60.808,58.496 60.808,77.038 cw(c61.874,77.038) 61.874,78.105 ccw(c61.874,80.645) 64.414,80.645 64.414,84.633 cw(c66.954,84.633) 66.954,87.173 72.746,87.173 72.746,86.385 73.889,86.385 73.939,86.457 73.912,87.046 73.921,87.213 ccw(c73.685,87.884) 74.397,87.884 ccw(c74.041,87.884) 74.041,88.24 cw(c74.041,88.722) 73.558,88.722 cw(c74.034,88.722) 74.034,89.198 75.495,89.198 cw(c75.495,88.773) 75.921,88.773 ccw(c76.429,88.773) 76.429,88.265 76.708,88.265 ccw(c76.708,88.748) 77.191,88.748 cw(c77.775,88.748) 77.775,89.332 117.573,89.332 117.573,50.575
VDD33 on Supply "Le GND" (solid, pour order 54): 36.641,50.805 55.734,50.805 57.988,50.805 57.988,58.75 60.619,58.75 60.619,62.6 60.619,69.926 60.619,77.268 cw(c61.686,77.268) 61.686,78.335 ccw(c61.686,80.875) 64.226,80.875 64.226,84.863 cw(c66.766,84.863) 66.766,87.403 73.497,87.403 ccw(c73.497,88.114) 74.208,88.114 ccw(c73.852,88.114) 73.852,88.47 cw(c73.852,88.952) 73.37,88.952 cw(c73.846,88.952) 73.846,89.428 75.307,89.428 cw(c75.307,89.003) 75.732,89.003 ccw(c76.24,89.003) 76.24,88.495 76.519,88.495 ccw(c76.519,88.978) 77.002,88.978 cw(c77.586,88.978) 77.586,89.562 117.384,89.562 117.384,111.736 36.641,111.736

## Silkscreen, mask and mechanical layers (free items; w line width, h text height)
Top Overlay:
  drawing of 3631 lines, arcs and shapes, not listed
  text "SYS_RES_N" at 38.303,101.905 h0.9
  text "SPI_CLK" at 38.303,99.922 h0.9
  text "SPI_EN" at 38.303,97.939 h0.9
  text "SPI_IN" at 38.303,95.956 h0.9
  text "SPI_OUT" at 38.303,93.974 h0.9
  text "FRAME_REQ" at 38.303,91.991 h0.9
  text "CLK_IN" at 38.303,90.008 h0.9
  text "LVDS_CLK_N" at 38.303,88.025 h0.9
  text "LVDS_CLK_P" at 38.303,86.042 h0.9
  text "OUT1_N" at 38.303,84.06 h0.9
  text "OUT1_P" at 38.303,82.077 h0.9
  text "OUTCTR_P" at 38.303,80.094 h0.9
  text "OUTCTR_N" at 38.303,78.111 h0.9
  text "OUT9_N" at 38.303,76.129 h0.9
  text "OUT9_P" at 38.303,74.146 h0.9
  text "OUTCLK_N" at 38.303,72.163 h0.9
  text "OUTCLK_P" at 38.303,70.18 h0.9
  text "Denis Penard - Jerome Skoda GEII1" at 93.116,51.841 h0.7
Bottom Overlay:
  drawing of 3684 lines, arcs and shapes, not listed
  text "100nF" at 80.696,72.746 h1.52
  text "100uF" at 80.67,69.952 h1.52
  text "4.7uF" at 80.645,66.802 h1.52
  text "100 ohms" at 80.721,63.983 h1.52
Mechanical 1:
  lines w0.254: 117.475,111.354 117.475,50.673 36.703,50.673 36.703,111.379 117.475,111.379

## Text inside footprints (layer, text, board x,y; h text height)
GPIO1: Top Overlay "39" at 48.438,55.804 h1.27; Top Overlay "40" at 54.762,53.238 h1.27; Top Overlay "2" at 57.963,104.318 h1.27; Top Overlay "1" at 50.317,104.267 h1.27